# Altium PCB SecuCarBoard.PcbDoc
Units mm, origin at the board's own origin, x right, y up, seen from the top; angles counter-clockwise.
Board outline 60 x 60 mm, 4 copper layers (Top Layer, Internal Plane 1, Internal Plane 2, Bottom Layer), stack 0.462 mm thick; 183 components, 115 nets, 574 pads, 16 vias.
Unrouted connection lines stored in the file: 345.
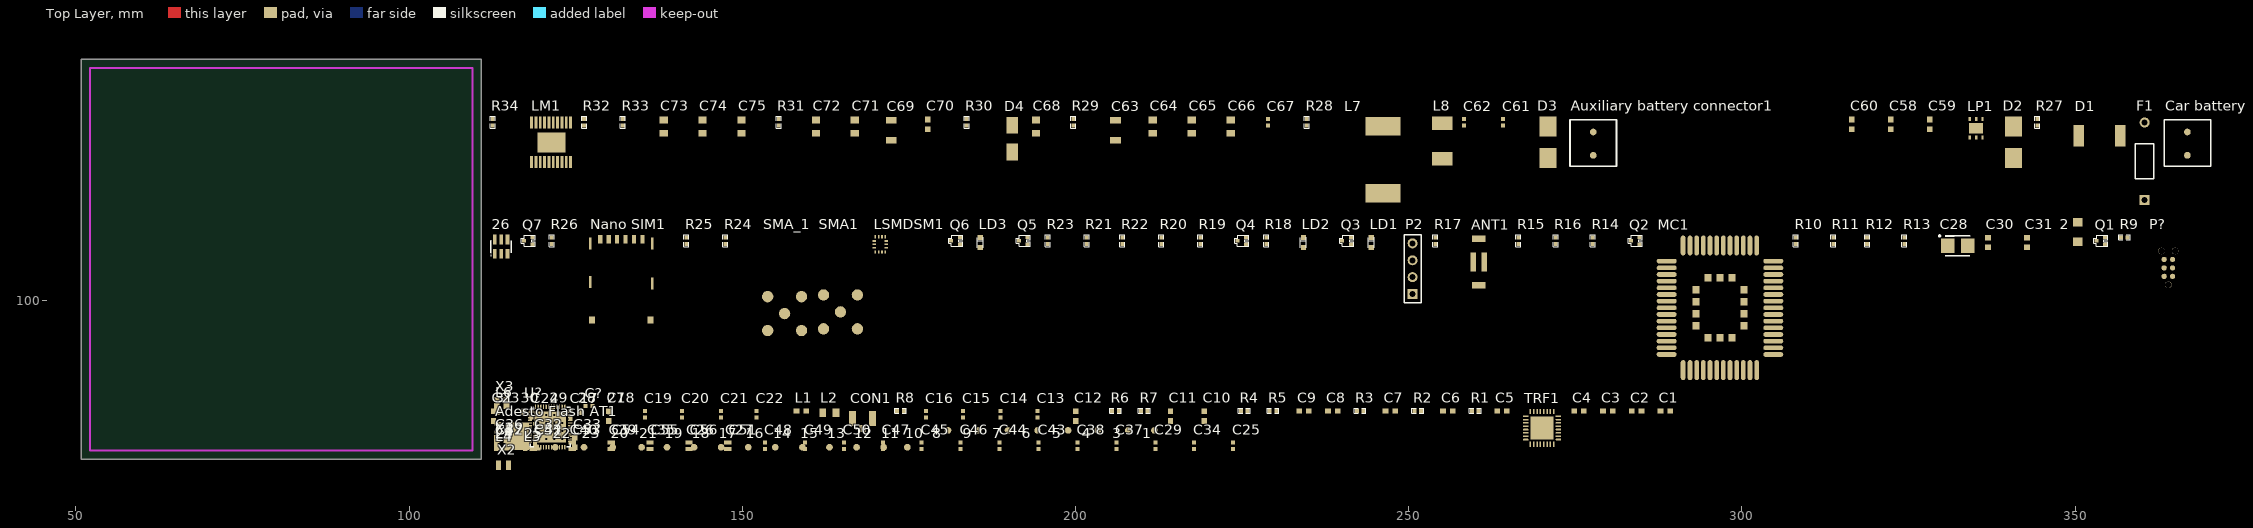
[diagram p0: Top Layer view]
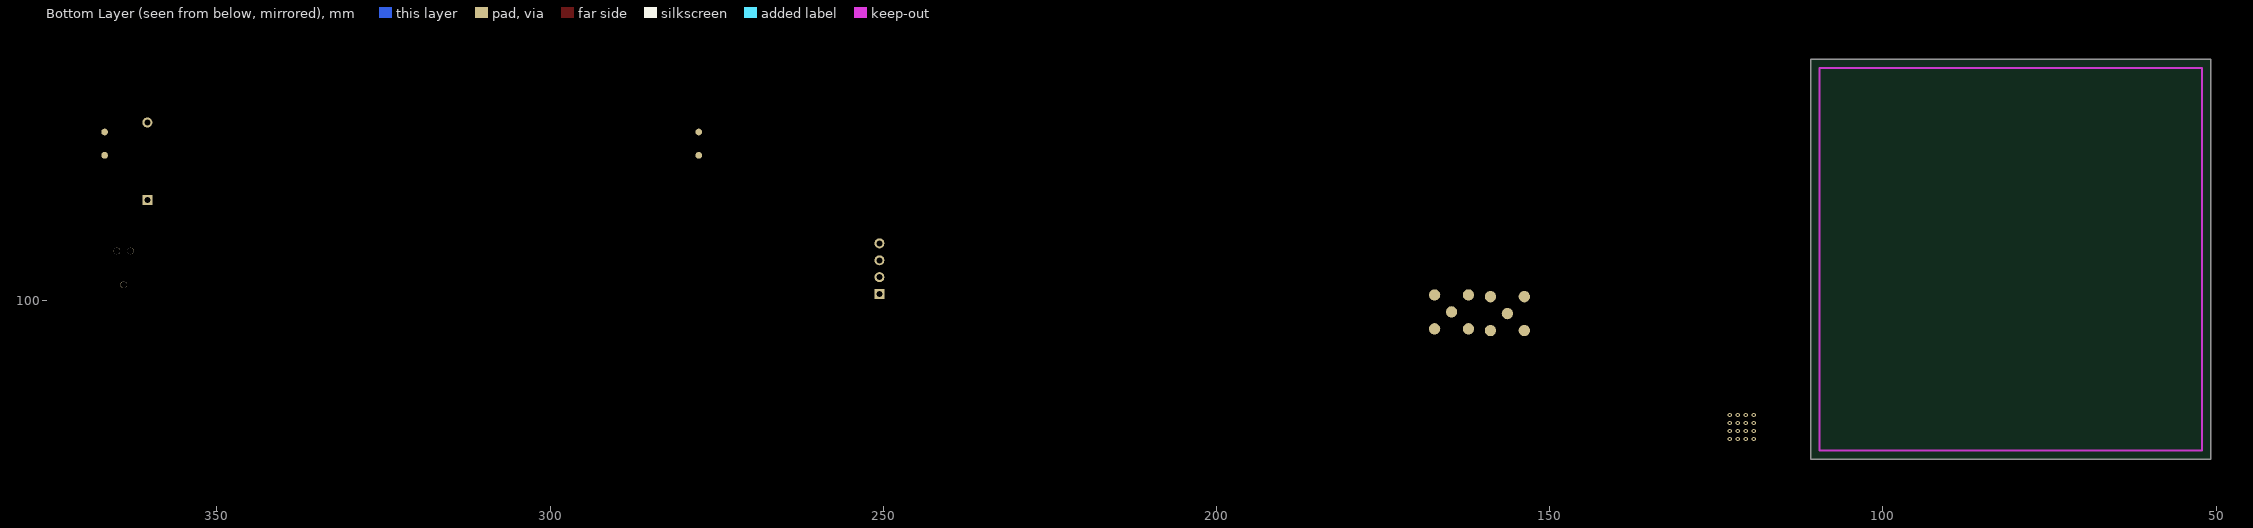
[diagram p1: Bottom Layer view, seen from below]
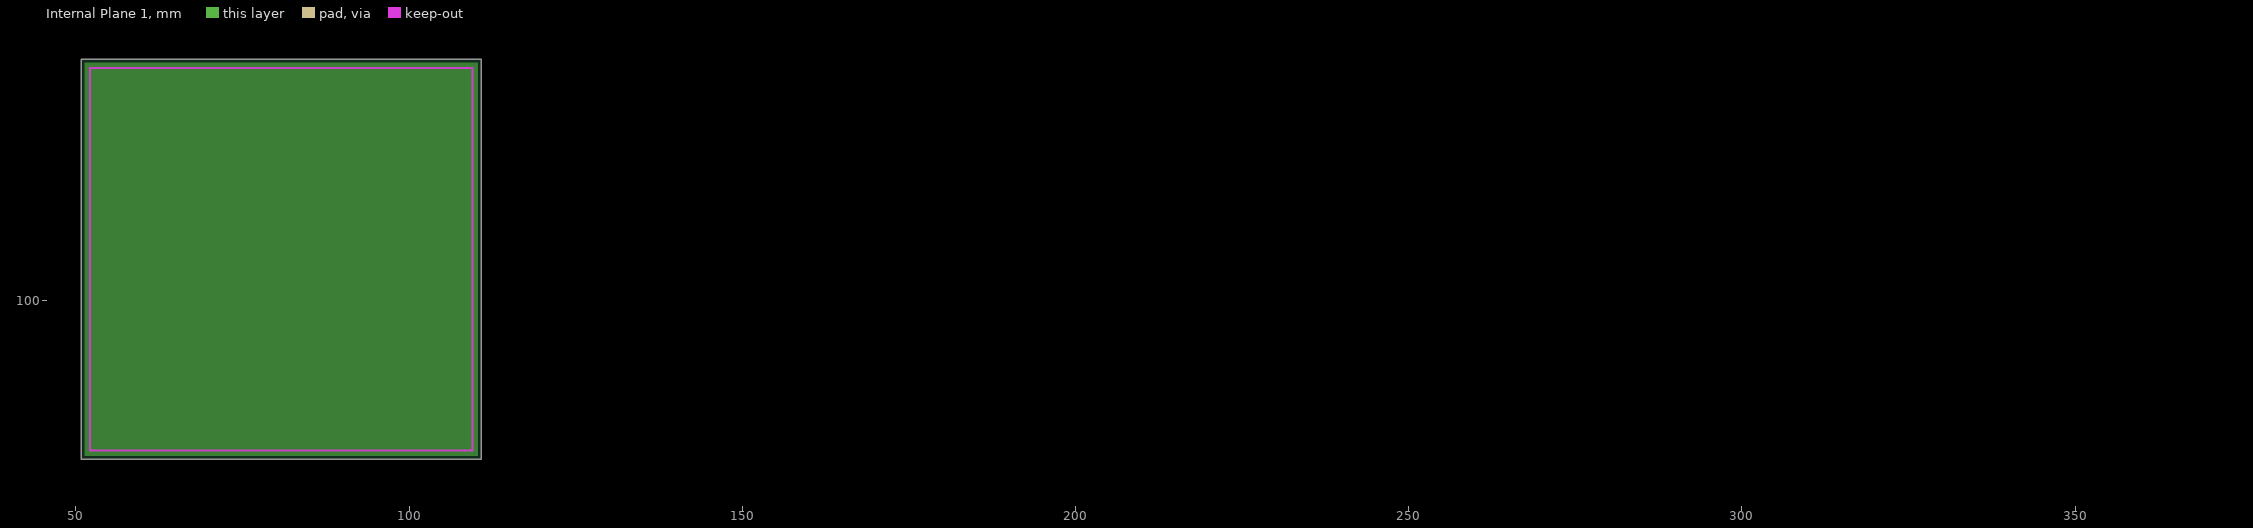
[diagram p2: Internal Plane 1, clearances drawn from the general rule]
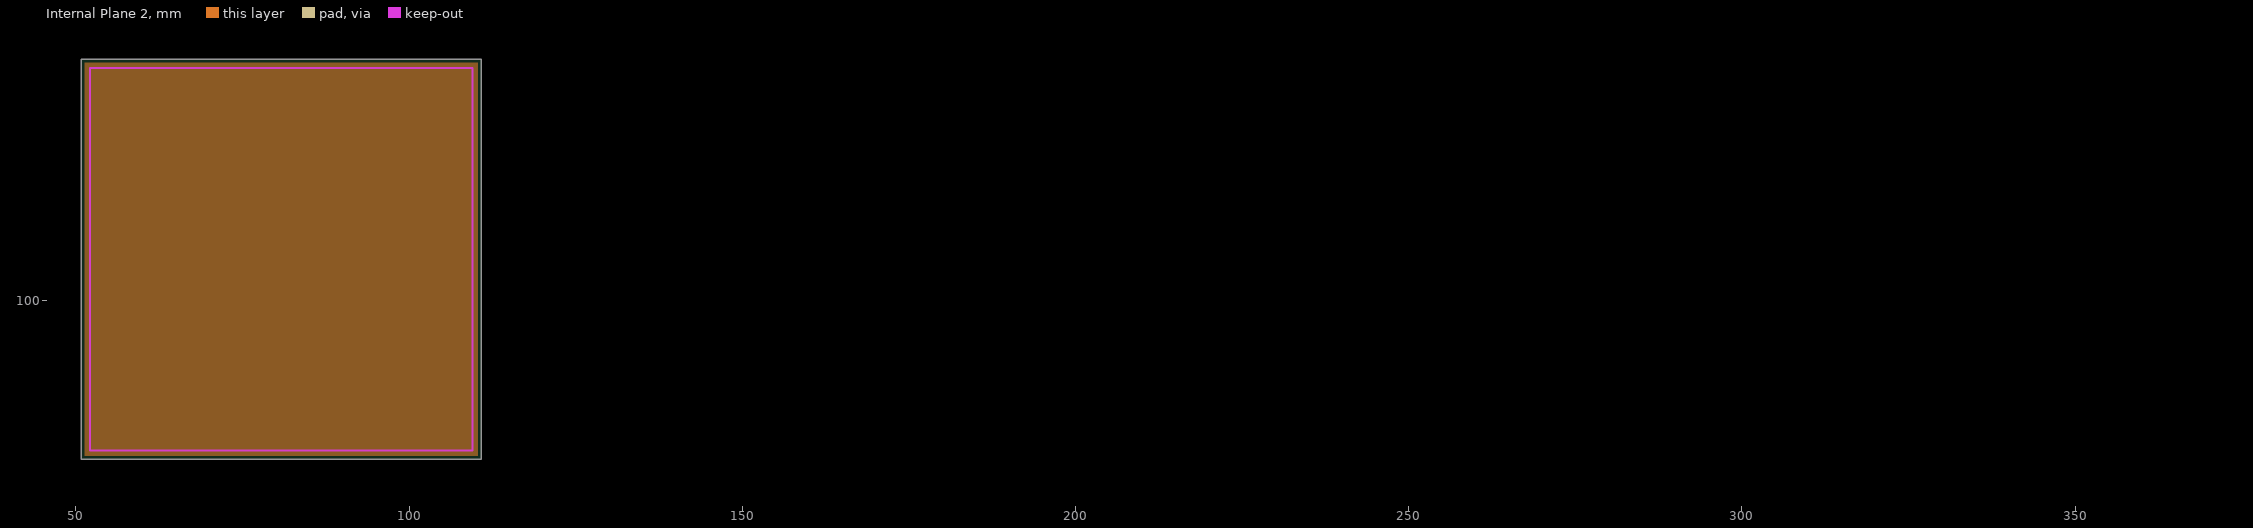
[diagram p3: Internal Plane 2, clearances drawn from the general rule]

## Layer stack, top to bottom
Top Solder: solder mask 0.0102, Solder Resist, Dk 3.5
Top Layer: signal copper 0.0356
Internal Plane 1: plane copper 0.0356
Internal Plane 2: plane copper 0.0356
Dielectric 1: dielectric 0.32, FR-4, Dk 4.8
Bottom Layer: signal copper 0.0356
Bottom Solder: solder mask 0.0102, Solder Resist, Dk 3.5

## Board outline
50.8,76.2 110.8,76.2 110.8,136.2 50.8,136.2

## Design rules (kind name [scope] priority, off if disabled: settings)
Clearance [All] p1: gap=0.2
PlaneClearance [All] p1: clearance=0.508
PlaneConnect [All] p1: planeconnectstyle=Relief reliefexpansion=0.508 reliefentries=4 reliefconductorwidth=0.254 reliefairgap=0.254
PolygonConnect [All] p1: connectstyle=Relief reliefconductorwidth=0.254 reliefentries=4 polygonreliefangle="90 Angle" airgapwidth=0.254
RoomDefinition MainBoardPower [InComponentClass('MainBoardPower')] p1: confinementstyle=ConfineIn formatcopy=TRUE lockcomponents=FALSE outline 111.887,113.919 395.732,113.919 395.732,130.429 111.887,130.429
RoomDefinition MainBoard [InComponentClass('MainBoard')] p2: confinementstyle=ConfineIn formatcopy=TRUE lockcomponents=FALSE outline 112.014,87.757 367.284,87.757 367.284,112.649 112.014,112.649
RoomDefinition Main_Board_NFC [InComponentClass('Main_Board_NFC')] p3: confinementstyle=ConfineIn formatcopy=TRUE lockcomponents=FALSE outline 112.014,77.724 289.941,77.724 289.941,86.614 112.014,86.614
RoutingVias [All] p1: holewidth=0.6 width=1 viastyle="Through Hole" minholewidth=0.711 minwidth=1.27 maxholewidth=0.711 maxwidth=1.27
SolderMaskExpansion [All] p1: expansion=0.102
Width [All] p1: maxlimit=0.2 minlimit=0.2 preferedwidth=0.2
28 further rules are at their usual default settings.

## Classes and differential pairs
component class MainBoard: 1 2 3 4 5 6 7 8 9 10 11 12 13 14 15 16 17 18 19 20 21 22 23 24 25 26 "Adesto Flash AT1" ANT1 C25 C26 C27 C28 C29 C30 C31 C32 C33 C34 C35 C36 C37 C38 C39 C40 C41 C42 C43 C44 C45 C46 C47 C48 C49 C50 C51 C52 C53 C54 C55 C56 C57 C? L3 L4 L5 L6 LD1 LD2 LD3 LSMDSM1 MC1 "Nano SIM1" P2 P? Q1 Q2 Q3 Q4 Q5 Q6 Q7 R9 R10 R11 R12 R13 R14 R15 R16 R17 R18 R19 R20 R21 R22 R23 R24 R25 R26 SMA1 SMA_1 U1 U? X2 X3
component class MainBoardPower: 27 28 29 30 31 "Auxiliary battery connector1" C58 C59 C60 C61 C62 C63 C64 C65 C66 C67 C68 C69 C70 C71 C72 C73 C74 C75 "Car battery connector1" D1 D2 D3 D4 F1 L7 L8 LM1 LP1 R27 R28 R29 R30 R31 R32 R33 R34
component class Main_Board_NFC: C1 C2 C3 C4 C5 C6 C7 C8 C9 C10 C11 C12 C13 C14 C15 C16 C17 C18 C19 C20 C21 C22 C23 C24 CON1 L1 L2 R1 R2 R3 R4 R5 R6 R7 R8 TRF1 X1

## Components (designator, comment, footprint, x,y, rotation, side; value= is the part's Value field where it differs from the comment)
1 "Ø1.0mm,SMD" TEST_POINT_1mm 211.836,80.518 r90 top
2 "DO219-AB (SMF)" DO219-AB 350.393,108.839 r90 top
3 "Ø1.0mm,SMD" TEST_POINT_1mm 207.899,80.518 r90 top
4 "Ø1.0mm,SMD" TEST_POINT_1mm 203.327,80.518 r90 top
5 "Ø1.0mm,SMD" TEST_POINT_1mm 198.882,80.518 r90 top
6 "Ø1.0mm,SMD" TEST_POINT_1mm 194.31,80.518 r90 top
7 "Ø1.0mm,SMD" TEST_POINT_1mm 189.865,80.518 r90 top
8 "Ø1.0mm,SMD" TEST_POINT_1mm 180.848,80.518 r90 top
9 "Ø1.0mm,SMD" TEST_POINT_1mm 185.42,80.518 r90 top
10 "Ø1.0mm,SMD" TEST_POINT_1mm 174.752,77.978 r0 top
11 "Ø1.0mm,SMD" TEST_POINT_1mm 171.196,77.978 r0 top
12 "Ø1.0mm,SMD" TEST_POINT_1mm 167.132,77.978 r0 top
13 "Ø1.0mm,SMD" TEST_POINT_1mm 163.068,77.978 r0 top
14 "Ø1.0mm,SMD" TEST_POINT_1mm 154.94,77.978 r0 top
15 "Ø1.0mm,SMD" TEST_POINT_1mm 159.004,77.978 r0 top
16 "Ø1.0mm,SMD" TEST_POINT_1mm 150.876,77.978 r0 top
17 "Ø1.0mm,SMD" TEST_POINT_1mm 146.812,77.978 r0 top
18 "Ø1.0mm,SMD" TEST_POINT_1mm 142.748,77.978 r0 top
19 "Ø1.0mm,SMD" TEST_POINT_1mm 138.684,77.978 r0 top
20 "Ø1.0mm,SMD" TEST_POINT_1mm 130.556,77.978 r0 top
21 "Ø1.0mm,SMD" TEST_POINT_1mm 134.874,77.978 r0 top
22 "Ø1.0mm,SMD" TEST_POINT_1mm 121.92,77.978 r0 top
23 "Ø1.0mm,SMD" TEST_POINT_1mm 126.238,77.978 r0 top
24 "Ø1.0mm,SMD" TEST_POINT_1mm 113.284,77.978 r0 top
25 "Ø1.0mm,SMD" TEST_POINT_1mm 117.602,77.978 r0 top
26 "TVS - ESD protection" SO-G6/P.95 113.792,108.077 r0 top
27 "Ø1.0mm,SMD" TEST_POINT_1mm 130.048,83.312 r0 top
28 "Ø1.0mm,SMD" TEST_POINT_1mm 125.73,83.312 r0 top
29 "Ø1.0mm,SMD" TEST_POINT_1mm 121.412,83.312 r0 top
30 "Ø1.0mm,SMD" TEST_POINT_1mm 117.094,83.312 r0 top
31 "Ø1.0mm,SMD" TEST_POINT_1mm 113.284,83.312 r0 top
"Adesto Flash AT1" "AT45DB641E" "UDFN 5x6mm 8pin" 119.126,77.089 r90 top
ANT1 "2450AT43B100" 2450AT43B100 260.477,105.791 r90 top
"Auxiliary battery connector1" "" ARK_3.5mm 281.178,120.142 r90 top
C1 "4.7µF" 0603 287.782,83.439 r0 top
C2 "2.2uF" 0603 283.464,83.439 r0 top
C3 "100nF" 0603 279.146,83.439 r0 top
C4 "10nF" 0603 274.828,83.439 r0 top
C5 "2.2uF" 0603 263.271,83.439 r0 top
C6 "10nF" 0603 255.143,83.439 r0 top
C7 "2.2uF" 0603 246.507,83.439 r0 top
C8 "10nF" 0603 237.871,83.439 r0 top
C9 "2.2uF" 0603 233.553,83.439 r0 top
C10 "10nF" 0603 219.329,81.915 r90 top
C11 "2.2uF" 0603 214.249,81.915 r90 top
C12 "10nF" 0603 200.025,81.915 r90 top
C13 "27pF" 0402 194.31,82.423 r90 top
C14 "27pF" 0402 188.722,82.423 r90 top
C15 "10pF" 0402 183.134,82.423 r90 top
C16 "1500pF" 0402 177.546,82.423 r90 top
C17 "1500pF" 0402 124.206,82.423 r90 top
C18 "1uF" 0603 129.921,81.915 r90 top
C19 "680pF" 0402 135.382,82.423 r90 top
C20 "220pF" 0402 140.97,82.423 r90 top
C21 "100pF" 0402 146.812,82.423 r90 top
C22 "27pF" 0402 152.146,82.423 r90 top
C23 "1uF" 0603 112.649,81.915 r90 top
C24 "680pF" 0402 118.364,82.423 r90 top
C25 "1.0µF" 0402 223.647,77.724 r90 top
C26 "12pF" 0402 141.732,77.724 r90 top
C27 "12pF" 0402 147.574,77.724 r90 top
C28 "" B 332.359,108.204 r0 top
C29 "100n" 0402 211.963,77.724 r90 top
C30 "" 1608[0603] 336.931,108.712 r90 top
C31 "" 1608[0603] 342.773,108.712 r90 top
C32 "10u" 0603 118.999,77.978 r90 top
C33 "10u" 0603 124.841,77.978 r90 top
C34 "100n" 0402 217.805,77.724 r90 top
C35 "12pF" 0402 135.89,77.724 r90 top
C36 "4.7µF" 0603 113.157,77.978 r90 top
C37 "100nF" 0402 206.121,77.724 r90 top
C38 "100nF" 0402 200.279,77.724 r90 top
C39 "12pF" 0402 130.048,77.724 r90 top
C40 "100pF" 0402 124.206,77.724 r90 top
C41 "100pF" 0402 118.872,77.724 r90 top
C42 "1.0pF" 0402 113.03,77.724 r90 top
C43 "100nF" 0402 194.437,77.724 r90 top
C44 "?" 0402 188.595,77.724 r90 top
C45 "?" 0402 176.911,77.724 r90 top
C46 "?" 0402 182.753,77.724 r90 top
C47 "?" 0402 171.069,77.724 r90 top
C48 "10uF" 0402 153.416,77.724 r90 top
C49 "100nF" 0402 159.385,77.724 r90 top
C50 "100nF" 0402 165.227,77.724 r90 top
C51 "100nF" 0402 148.082,77.724 r90 top
C52 "33pF" 0402 118.872,77.724 r90 top
C53 "33pF" 0402 124.714,77.724 r90 top
C54 "33pF" 0402 130.556,77.724 r90 top
C55 "33pF" 0402 136.398,77.724 r90 top
C56 "100nF" 0402 142.24,77.724 r90 top
C57 "100nF" 0402 113.03,77.724 r90 top
C58 "10u" 0603 322.326,125.73 r90 top
C59 "1u" 0603 328.168,125.73 r90 top
C60 "1u" 0603 316.484,125.73 r90 top
C61 "Capacitor_MLCC" 0402 264.16,126.238 r90 top
C62 "Capacitor_MLCC" 0402 258.318,126.238 r90 top
C63 "100uF" 1206 205.994,124.079 r90 top
C64 "22uF" 0805 211.582,125.095 r90 top
C65 "22uF" 0805 217.424,125.095 r90 top
C66 "22uF" 0805 223.266,125.095 r90 top
C67 "Capacitor_MLCC" 0402 228.854,126.238 r90 top
C68 "100nF" 0805 194.056,125.095 r90 top
C69 "100uF" 1206 172.339,124.079 r90 top
C70 "4.7uF" 0603 177.8,125.73 r90 top
C71 "10uF" 0805 166.878,125.095 r90 top
C72 "20uF" 0805 161.036,125.095 r90 top
C73 "2.2nF" 0805 138.176,125.095 r90 top
C74 "10nF" 0805 144.018,125.095 r90 top
C75 "10uF" 0805 149.86,125.095 r90 top
C? "100nF" 0402 126.492,84.201 r0 top
"Car battery connector1" "" ARK_3.5mm 370.332,120.142 r90 top
CON1 "UFL Connector" "UFL SMD" 168.021,82.296 r0 top
D1 "Transil_TVS_bidirectional" DO-214-AB 350.52,124.714 r0 top
D2 "Shottky_DO-214-AA" DO-214-AA 340.741,121.412 r90 top
D3 "Shottky_DO-214-AA" DO-214-AA 270.891,121.412 r90 top
D4 "Shottky" SMA 190.5,122.301 r90 top
F1 "Fuse 1" PIN-W2/E2.8 360.426,120.904 r90 top
L1 "150nH" 0603 158.115,83.439 r0 top
L2 "330nH" 0805 162.052,83.185 r0 top
L3 "47nH" 0402 117.348,77.724 r0 top
L4 "15nH" 0402 113.03,77.724 r0 top
L5 "10µH" 0603 113.157,77.978 r0 top
L6 "3.3nH" 0603 113.157,84.201 r0 top
L7 "12uH" SRR1210A 246.126,116.078 r0 top
L8 "105nH" "7.15mm x 7mm x 5mm" 255.016,121.285 r90 top
LD1 "LED_0603_Blue" LED_0603 244.348,108.712 r90 top
LD2 "LED_0603_Blue" LED_0603 234.188,108.712 r90 top
LD3 "LED_0603_Blue" LED_0603 185.674,108.712 r90 top
LM1 "Automotive DCDC" TSSOP20_footprint 118.364,120.777 r0 top
LP1 "LDO" WSON-6 335.153,124.46 r0 top
LSMDSM1 "LSMDSM" LGA-14L 171.958,106.934 r90 top
MC1 "Quectel MC60" "Quactel MC60 Footprint" 287.401,88.265 r0 top
"Nano SIM1" "Nano SIM" NANO_Sim_Holder 131.826,109.22 r0 top
P2 "Header 4" HDR1X4 250.571,100.965 r90 top
P? "TC2030-CTX-NL" TC2030-IDC-NLFP 363.982,104.902 r90 top
Q1 "RZE002P02TLTR-ND" SOT-416 353.822,108.966 r0 top
Q2 "RZE002P02TLTR-ND" SOT-416 283.972,108.966 r0 top
Q3 "RZE002P02TLTR-ND" SOT-416 240.665,108.966 r0 top
Q4 "RZE002P02TLTR-ND" SOT-416 224.917,108.966 r0 top
Q5 "RZE002P02TLTR-ND" SOT-416 192.151,108.966 r0 top
Q6 "RZE002P02TLTR-ND" SOT-416 181.991,108.966 r0 top
Q7 "RZE002P02TLTR-ND" SOT-416 117.856,108.966 r0 top
R1 "RES_0402_1k" RES_0402 259.969,83.439 r0 top
R2 "RES_0402_1k" RES_0402 251.333,83.439 r0 top
R3 "RES_0402_1k" RES_0402 242.697,83.439 r0 top
R4 "RES_0402_1k" RES_0402 225.298,83.439 r0 top
R5 "RES_0402_1k" RES_0402 229.616,83.439 r0 top
R6 "RES_0402_1k" RES_0402 205.994,83.439 r0 top
R7 "RES_0402_1k" RES_0402 210.312,83.439 r0 top
R8 "RES_0402_1k" RES_0402 173.736,83.439 r0 top
R9 "RES_0402_1k" RES_0402 357.378,109.474 r0 top
R10 "RES_0402_1k" RES_0402 308.102,108.966 r90 top
R11 "RES_0402_1k" RES_0402 313.69,108.966 r90 top
R12 "RES_0402_1k" RES_0402 318.77,108.966 r90 top
R13 "RES_0402_1k" RES_0402 324.358,108.966 r90 top
R14 "RES_0402_1k" RES_0402 277.622,108.966 r90 top
R15 "RES_0402_1k" RES_0402 266.446,108.966 r90 top
R16 "RES_0402_1k" RES_0402 272.034,108.966 r90 top
R17 "RES_0402_1k" RES_0402 254,108.966 r90 top
R18 "RES_0402_1k" RES_0402 228.6,108.966 r90 top
R19 "RES_0402_1k" RES_0402 218.694,108.966 r90 top
R20 "RES_0402_1k" RES_0402 212.852,108.966 r90 top
R21 "RES_0402_1k" RES_0402 201.676,108.966 r90 top
R22 "RES_0402_1k" RES_0402 207.01,108.966 r90 top
R23 "RES_0402_1k" RES_0402 195.834,108.966 r90 top
R24 "RES_0402_1k" RES_0402 147.447,108.966 r90 top
R25 "RES_0402_1k" RES_0402 141.605,108.966 r90 top
R26 "RES_0402_1k" RES_0402 121.412,108.966 r90 top
R27 "RES_0402_1k" RES_0402 344.297,126.746 r90 top
R28 "RES_0402_1k" RES_0402 234.696,126.746 r90 top
R29 "RES_0402_1k" RES_0402 199.644,126.746 r90 top
R30 "RES_0402_1k" RES_0402 183.642,126.746 r90 top
R31 "RES_0402_1k" RES_0402 155.448,126.746 r90 top
R32 "RES_0402_1k" RES_0402 126.238,126.746 r90 top
R33 "RES_0402_1k" RES_0402 132.08,126.746 r90 top
R34 "RES_0402_1k" RES_0402 112.522,126.746 r90 top
SMA1 "GNSS_SMA" SMA_Footprint 164.719,98.298 r90 top
SMA_1 "GSM_SMA" SMA_Footprint 156.337,98.044 r90 top
TRF1 "TRF7960A" RHB32 270.002,80.899 r0 top
U? "nRF52832-QFAA" QFN40P600X600X90-48N 121.158,81.026 r0 top
X1 "13.56MHz" XTAL_2016 113.157,77.851 r0 top
X2 "32.768kHz" XTAL_2012 113.411,75.311 r0 top
X3 "32MHz" XTAL_2016 113.157,84.074 r0 top

## Footprints (in the part's own frame and the unit in brackets; to place one, negate y for a bottom-side part, rotate by r counter-clockwise, add the part's x,y. Pads: shape width x height; smd on the part's side, far side on the other; paste and mask are expansions set on the pad)
"7.15mm x 7mm x 5mm" [mm]
  rect 2x3.05 smd: 1(0,0) 2(5.3,0)
0402 [mm]
  rect 0.6x0.6 smd: 1(0,0) 2(1,0)
  body extent -0.01,-0.3 1.03,0.3, height 0.34
0603 [mm]
  rect 0.85x0.8 smd: 1(0,0) 2(1.45,0)
  body extent -0.04,-0.4 1.56,0.4, height 0.6
0805 [mm]
  rect 1x1.25 smd: 1(0,0) 2(2,0)
  body extent -0.11,-0.62 1.89,0.63, height 0.78
1206 [mm]
  rect 1x1.6 smd: 1(0,0) 2(3,0)
  body extent -0.08,-0.8 3.12,0.8, height 1
1608[0603] [mm] "Chip Capacitor, Body 1.6x0.8mm, IPC High Density"
  rect 0.8x0.9 smd: 1(-0.7,0) 2(0.7,0)
  body extent -0.87,-0.48 0.87,0.48, height 1.3
2450AT43B100 [mm]
  rect 1x2 smd: 1(-3.5,0) 2(3.5,0)
  rect 2.8x0.8 smd: 3(0,-0.825) 4(0,0.825)
  body extent -3.5,-1 3.5,1, height 2
ARK_3.5mm [mm]
  round 1 all layers, no hole: 1(1.651,3.5) 2(5.151,3.5)
  silkscreen extent 0,0 6.98,6.98, body extent -0.07,0.13 6.93,7.03, height 8.8
B [mm] "Capacitor, SM Tantalum; Body 3.5 x 2.8 mm (LxW typ)"
  rect 2x2.2 smd: 1(-1.5,0) 2(1.5,0)
  silkscreen extent -2.82,-1.5 1.85,1.62, body extent -1.85,-1.46 1.85,1.47, height 2.03
DO219-AB [mm]
  rect 1.3x1.4 smd: 1(2.9,0) 2(0,0)
  body extent -0.43,-0.95 3.47,0.95, height 1.25
DO-214-AA [mm]
  rect 3x2.5 smd: 1(0,0) 2(4.7,0)
  body extent -0.24,-1.85 5.06,1.85, height 2.2
DO-214-AB [mm]
  rect 1.55x3.2 smd: 1(0,0) 2(6.25,0)
  body extent -0.85,-2.95 6.95,2.95, height 2.4
HDR1X4 [mm] "Connector; Header; 4 Position"
  rect 1.5x1.5 hole 0.9: 1(0,0)
  round 1.5 hole 0.9: 2(2.54,0) 3(5.08,0) 4(7.62,0)
  silkscreen extent -1.27,-1.27 8.89,1.27
LED_0603 [mm]
  rect 0.8x0.8 smd: 1(-0.75,0) 2(0.75,0)
  silkscreen extent -0.77,-0.45 0.77,0.45, body extent -0.8,-0.4 0.8,0.4, height 0.28
LGA-14L [mm]
  round 0.1 on Top Overlay: 1(0.127,2.286)
  rect 0.5x0.25 smd: 1(0.35,2) 2(0.35,1.5) 3(0.35,1) 4(0.35,0.5) 8(2.65,0.5) 9(2.65,1) 10(2.65,1.5) 11(2.65,2)
  rect 0.25x0.5 smd: 5(1,0.35) 6(1.5,0.35) 7(2,0.35) 12(2,2.15) 13(1.5,2.15) 14(1,2.15)
  body extent 0.02,0.02 3.02,2.52, height 1
NANO_Sim_Holder [mm]
  rect 0.65x1.3 smd: C1(1.905,0) C2(-0.635,0) C3(-1.905,0) C5(3.175,0) C6(0.635,0) C7(-3.175,0)
  rect 0.35x1.8 smd: ""(-4.65,-6.42) ""(-4.65,-0.67) ""(4.65,-6.65) ""(4.65,-0.67)
  rect 0.9x1 smd: ""(-4.4,-12.14) ""(4.4,-12.14)
  body extent -4.75,-12.6 4.75,-0.1, height 1.1
PIN-W2/E2.8 [mm] "Thru-Hole; 2 Leads"
  rect 1.5x1.5 hole 0.9: 1(-5.825,0)
  round 1.5 hole 0.9: 2(5.825,0)
  silkscreen extent -2.65,-1.4 2.65,1.4
QFN40P600X600X90-48N [mm]
  oval 0.65x0.2 smd: 1(-3.025,2.2) 2(-3.025,1.8) 3(-3.025,1.4) 4(-3.025,1) 5(-3.025,0.6) 6(-3.025,0.2) 7(-3.025,-0.2) 8(-3.025,-0.6) 9(-3.025,-1) 10(-3.025,-1.4) 11(-3.025,-1.8) 12(-3.025,-2.2) 25(3.025,-2.2) 26(3.025,-1.8) 27(3.025,-1.4) 28(3.025,-1) 29(3.025,-0.6) 30(3.025,-0.2) 31(3.025,0.2) 32(3.025,0.6) 33(3.025,1) 34(3.025,1.4) 35(3.025,1.8) 36(3.025,2.2)
  oval 0.2x0.65 smd: 13(-2.2,-3.025) 14(-1.8,-3.025) 15(-1.4,-3.025) 16(-1,-3.025) 17(-0.6,-3.025) 18(-0.2,-3.025) 19(0.2,-3.025) 20(0.6,-3.025) 21(1,-3.025) 22(1.4,-3.025) 23(1.8,-3.025) 24(2.2,-3.025) 37(2.2,3.025) 38(1.8,3.025) 39(1.4,3.025) 40(1,3.025) 41(0.6,3.025) 42(0.2,3.025) 43(-0.2,3.025) 44(-0.6,3.025) 45(-1,3.025) 46(-1.4,3.025) 47(-1.8,3.025) 48(-2.2,3.025)
  rect 4.7x4.7 smd: 49(0,0)
  silkscreen extent -4.02,-3 3,3, body extent -3.02,-3.02 3.02,3.02, height 0.86
"Quactel MC60 Footprint" [mm]
  round 0.5 on Top Overlay: 0(1.8,19.35)
  rrect100% 3x0.7 smd: 1(1.3,17.65) 2(1.3,16.65) 3(1.3,15.65) 4(1.3,14.65) 5(1.3,13.65) 6(1.3,12.65) 7(1.3,11.65) 8(1.3,10.65) 9(1.292,9.65) 10(1.292,8.65) 11(1.292,7.65) 12(1.292,6.65) 13(1.292,5.65) 14(1.292,4.65) 15(1.292,3.65) 28(17.292,3.65) 29(17.292,4.65) 30(17.292,5.65) 31(17.292,6.65) 32(17.292,7.65) 33(17.292,8.65) 34(17.292,9.65) 35(17.3,10.65) 36(17.3,11.65) 37(17.3,12.65) 38(17.3,13.65) 39(17.3,14.65) 40(17.3,15.65) 41(17.3,16.65) 42(17.3,17.65)
  rrect100% 0.7x3 smd: 16(3.759,1.3) 17(4.8,1.3) 18(5.8,1.3) 19(6.8,1.3) 20(7.8,1.3) 21(8.8,1.3) 22(9.8,1.3) 23(10.8,1.3) 24(11.8,1.3) 25(12.8,1.3) 26(13.8,1.3) 27(14.8,1.3) 43(14.8,20) 44(13.8,20) 45(12.8,20) 46(11.8,20) 47(10.8,20) 48(9.8,20) 49(8.8,20) 50(7.8,20) 51(6.8,20) 52(5.8,20) 53(4.8,20) 54(3.759,20)
  rect 1.1x1.1 smd: 55(5.7,13.35) 56(5.7,11.55) 57(5.7,9.75) 58(5.7,7.95) 59(7.5,6.15) 60(9.3,6.15) 61(11.1,6.15) 62(12.9,7.95) 63(12.9,9.75) 64(12.9,11.55) 65(12.9,13.35) 66(11.1,15.15) 67(9.3,15.15) 68(7.5,15.15)
RES_0402 [mm]
  rect 0.6x0.55 smd: 1(-0.5,0) 2(0.5,0)
  silkscreen extent -0.87,-0.38 0.88,0.38, body extent -0.5,-0.25 0.5,0.25, height 0.3
RHB32 [mm]
  rrect50% 0.23x0.8 smd: 1(-1.75,-2.45) 2(-1.25,-2.45) 3(-0.75,-2.45) 4(-0.25,-2.45) 5(0.25,-2.45) 6(0.75,-2.45) 7(1.25,-2.45) 8(1.75,-2.45) 17(1.75,2.45) 18(1.25,2.45) 19(0.75,2.45) 20(0.25,2.45) 21(-0.25,2.45) 22(-0.75,2.45) 23(-1.25,2.45) 24(-1.75,2.45)
  rrect50% 0.8x0.23 smd: 9(2.45,-1.75) 10(2.45,-1.25) 11(2.45,-0.75) 12(2.45,-0.25) 13(2.45,0.25) 14(2.45,0.75) 15(2.45,1.25) 16(2.45,1.75) 25(-2.45,1.75) 26(-2.45,1.25) 27(-2.45,0.75) 28(-2.45,0.25) 29(-2.45,-0.25) 30(-2.45,-0.75) 31(-2.45,-1.25) 32(-2.45,-1.75)
  rect 3.45x3.45 smd: GND(0,0)
  body extent -2.56,-2.56 2.56,2.56, height 1.01
SMA [mm]
  rect 2.5x1.7 smd: 1(0,0) 2(4,0)
  body extent -0.89,-1.47 4.71,1.48, height 2.7
SMA_Footprint [mm]
  round 1.7 all layers, no hole: 1(0,0) GND(-2.54,-2.54) GND(-2.54,2.54) GND(2.54,-2.54) GND(2.54,2.54)
  body extent -3.18,-3.18 11.63,3.18, height 9.55
SO-G6/P.95 [mm] "SOT-457/SC-74; 6 Leads; Body 3.1 x 3 mm, inc. leads (LxW max)"
  rect 0.55x1.45 smd: 1(-0.95,-1.075) 2(0,-1.075) 3(0.95,-1.075) 4(0.95,1.075) 5(0,1.075) 6(-0.95,1.075)
  silkscreen extent -1.57,-1.35 1.55,0.9, body extent -1.46,-1.16 1.44,1.24, height 1
SOT-416 [mm]
  rect 0.6x0.5 smd: 1(0.65,-0.5) 2(0.65,0.5) 3(-0.65,0)
  silkscreen extent -1.05,-0.85 1.05,0.85, body extent -0.8,-0.8 0.8,0.8, height 0.78
SRR1210A [mm]
  rect 5.3x2.8 smd: 1(0,0) 2(0,10.1)
  body extent -6.03,-0.92 5.97,11.08, height 9.42
TC2030-IDC-NLFP [mil]
  round 39 hole 39 unplated: 0(-100,0) 0(100,-40) 0(100,40)
  round 31 smd paste-196.85: 1(-50,-25) 2(-50,25) 3(0,-25) 4(0,25) 5(50,-25) 6(50,25)
  Top Layer pour cut-out: -50,25 -50,-25 50,-25 50,25
TEST_POINT_1mm [mm]
  round 1 smd: 0(0,0)
TSSOP20_footprint [mm]
  rect 0.42x1.78 smd: 1(0,0) 2(0.65,0) 3(1.3,0) 4(1.95,0) 5(2.6,0) 6(3.25,0) 7(3.9,0) 8(4.55,0) 9(5.2,0) 10(5.85,0) 11(5.85,5.94) 12(5.2,5.94) 13(4.55,5.94) 14(3.9,5.94) 15(3.25,5.94) 16(2.6,5.94) 17(1.95,5.94) 18(1.3,5.94) 19(0.65,5.94) 20(0,5.94)
  rect 4.2x3 smd: 21(2.97,2.925)
  body extent -0.33,-0.15 6.17,6.25, height 1.2
"UDFN 5x6mm 8pin" [mm]
  rect 4.1x3.5 smd: 0(2.54,2.921)
  rect 0.5x1.1 smd: 1(0.635,0) 1(0.635,0) 2(1.905,0) 2(1.905,0) 3(3.175,0) 3(3.175,0) 4(4.445,0) 4(4.445,0) 5(4.445,5.8) 6(3.175,5.8) 7(1.905,5.8) 8(0.635,5.8)
"UFL SMD" [mm]
  rect 1x1 smd: 1(0,-1.5)
  rect 1.05x2.2 smd: 2(-1.475,0) 2(1.475,0)
  body extent -1.7,-1.55 1.7,1.55, height 1.25
WSON-6 [mm]
  rect 0.351x0.61 smd: 1(-0.95,0) 2(0,0) 3(0.95,0) 4(0.95,2.8) 5(0,2.8) 6(-0.95,2.8)
  round 0.2 on Top Overlay: 2(-1.476,-0.113)
  rect 2.1x1.6 smd: ""(0,1.4)
  body extent -1.48,-0.11 1.52,2.91, height 0.75
XTAL_2012 [mm]
  rect 0.7x1.4 smd: 1(0,0) 2(1.5,0)
  body extent -0.26,-0.62 1.79,0.62, height 0.63
XTAL_2016 [mm]
  rect 0.8x0.7 smd: 1(0,0) 2(1.4,0) 3(1.4,1.1) 4(0,1.1)
  body extent -0.36,-0.29 1.64,1.31, height 0.7

## Part data
1 3 4 5 6 7 8 9 10 11 12 13 14 15 16 17 18 19 20 21 22 23 24 25 27 28 29 30 31: library part TESTPAD, "1.0mm circular SMD testpad"
2: library part "Zener Diode"
26: library part TPD4E001-DBV
"Auxiliary battery connector1" "Car battery connector1" SMA1 SMA_1: library part Component_1
C1 C2 C5 C7 C9 C11 C18 C23 C32 C33 C36 C58 C59 C60: library part C0603-4µ7, "Capacitor, X5R, ±10%"
C3 C4 C6 C8 C10 C12: library part C0201-100n, "Capacitor, X7R, ±10%"
C13 C14 C15 C16 C17 C19 C20 C21 C22 C24 C63 C64 C65 C66 C68 C69 C70 C71 C72 C73 C74 C75: library part Capacitor_MLCC, "?"
C25: library part C0402-1µ0, "Capacitor, X5R, ±5%"
C26 C27 C35 C39: library part C0201-12p, "Capacitor, NP0, ±2%"
C28: library part CAP_B_100u, "Solid Tantalum Capacitor"
C29 C34 C37 C38 C43 C44 C45 C46 C47 C48 C49 C50 C51 C52 C53 C54 C55 C56 C57 C?: library part CAP_0402, "Capacitor, NP0, ±2%"
C30 C31: library part "Cap Semi", "Capacitor (Semiconductor SIM Model)"
C40 C41: library part C0201-100p, "Capacitor, NP0, ±5%"
C42: library part C0201-1.0p, "Capacitor, NP0, ±5%"
C61 C62 C67: "?"
D1: library part TVS_bidirectional, "TVS_bi"
D4: library part Shottky_diode
F1: "Fuse"
L1 L2 L7 L8: library part Inductor
L3 L4: library part L0402-15n, "High frequency chip inductor ±10%"
L5: library part L0603-10µ, "Chip inductor, IDC,min = 50 mA, ±20%"
L6: library part L0201-3n3, "High frequency chip inductor ±5%"
LM1: library part LM26003-q1
LP1: library part "LP38693 WSON Package"
P2: "Header, 4-Pin"
P?: library part CONN-2x3_No_BOM, "CBL PLUG-OF-NAILS 6-PIN"
U?: library part nRF52832_QFAA, "Multi-protocol Bluetooth Low Energy and 2.4GHz proprietary system-on-chip"
X1 X3: library part XTAL_SMD2016_32MHz_8pF_Epson, "XTAL SMD 2016, 32MHz, Cl=8pF, Total Tol: ±40ppm"
X2: library part XTAL_SMD2012_32.768kHz_9pF_Seiko, "XTAL SMD 2012, 32.768kHz, Cl=9pF, Total Tol: ±50ppm"

## Via types
v1: diameter 0.66, hole 0.33, Top Layer to Bottom Layer, 16 vias

## Nets (pads, with @x,y where several pads share a name; then routed paths per layer and width w, separated by ;. In a path a pad name is that pad's centre, name@x,y a point inside that pad or via, vN(x,y) a via of type N, cw(c..) or ccw(c..) an arc to the next point about the centre after c; other vN are vias at no path point)
3.3V: C33.1 C34.2 C36.1 C37.2 C43.2 C60.1 C?.2 LD1.1 LD2.1 LP1.4 LP1.5 MC1.26 P?.1 Q5.3 Q7.3 R4.2 R5.2 R9.2 TRF1.16 U?.13 U?.36 U?.48
4V: 26.5 C1.2 C2.1 C3.2 C4.2 C57.2 C58.1 C59.1 C70.1 C72.2 L8.2 LP1.1 LP1.6 Q1.3 Q6.3 R27.2 TRF1.2
DEC4: C25.2 L4.1 U?.46
GND: 2.1 26.2 "Adesto Flash AT1.7" "Auxiliary battery connector1.1" "Car battery connector1.1" C1.1 C2.2 C3.1 C4.1 C5.2 C6.1 C7.2 C8.1 C9.2 C10.1 C11.2 C12.1 C13.1 C14.1 C19.1 C21.1 C22.2 C23.2 C24.1 C25.1 C26.2 C27.2 C28.2 C29.1 C30.1 C31.1 C32.2 C33.2 C34.1 C35.1 C36.2 C37.1 C38.2 C39.1 C40.2 C41.1 C42.1 C43.1 C44.2 C45.2 C46.2 C47.2 C48.2 C49.1 C50.1 C52.2 C53.2 C54.1 C55.2 C56.1 C57.1 C58.2 C59.2 C60.2 C61.2 C62.2 C63.1 C64.1 C65.1 C66.1 C67.1 C69.1 C70.2 C71.1 C72.1 C73.1 C75.1 C?.1 CON1.2 D1.1 D4.1 LM1.10 LM1.11 LM1.13 LM1.21 LP1.2@335.153,124.46 LSMDSM1.2 LSMDSM1.3 LSMDSM1.6 LSMDSM1.7 MC1.14 MC1.27 MC1.31 MC1.40 MC1.42 MC1.44 MC1.45 MC1.48 MC1.49 P2.4 P?.5 Q2.2 R1.1 R2.1 R14.1 R16.1 R17.1 R18.1 R23.1 R31.2 R32.2 R33.2 R34.2 TRF1.6 TRF1.7 TRF1.10 TRF1.15 TRF1.17 TRF1.29 U?.31 U?.45 U?.49 X1.2 X1.4 X3.2 X3.4
  other v1: 119.358,79.226 120.558,79.226 121.758,79.226 122.958,79.226 119.358,80.426 120.558,80.426 121.758,80.426 122.958,80.426 119.358,81.626 120.558,81.626 121.758,81.626 122.958,81.626 119.358,82.826 120.558,82.826 121.758,82.826 122.958,82.826
Net1_1: Q1.1 U?.20
Net2_2: 2.2 C28.1 C29.2 C30.2 C31.2 C32.1 MC1.50 MC1.51 Q1.2
Net4_1: MC1.34 R10.1 R14.2
Net5_1: MC1.33 R11.1
Net6_1: MC1.39 R12.1 R16.2
Net7_1: MC1.38 R13.1
Net8_1: MC1.35 R15.2
Net9_1: Q2.1 U?.24
Net10_1: Q5.1 U?.6
Net11_1: MC1.47 Q6.1
Net12_1: LSMDSM1.14 U?.7
Net13_1: LSMDSM1.13 U?.8
Net14_1: LSMDSM1.1@169.958,107.284 U?.9
Net15_1: LSMDSM1.12 U?.10
Net16_1: LSMDSM1.4 U?.11
Net17_1: LSMDSM1.9 U?.12
Net18_1: 26.1 "Nano SIM1.C1" C51.1 C55.1 MC1.18
Net19_1: "Adesto Flash AT1.4" U?.40
Net20_1: "Adesto Flash AT1.3" "Adesto Flash AT1.5" "Adesto Flash AT1.6" C56.2 Q7.2
Net22_1: Q7.1 U?.39
Net23_1: "Adesto Flash AT1.2" U?.43
Net24_1: "Adesto Flash AT1.8" TRF1.23 U?.42
Net25_1: "Adesto Flash AT1.1" TRF1.24 U?.41
Net26_3: 26.3 "Nano SIM1.C3" C52.1 R26.2
Net26_4: 26.4 "Nano SIM1.C2" C53.1 R25.2
Net26_6: 26.6 "Nano SIM1.C7" C54.2 R24.2
Net27_1: C62.1 C63.2 C64.2 C65.2 C66.2 C67.2 D2.2 D3.2 LM1.1 LM1.2 LM1.3 LM1.4 R28.1
NetANT1_1: ANT1.1 L6.2
"NetAuxiliary battery connector1_2": "Auxiliary battery connector1.2" D3.1
NetC5_1: C5.1 C6.2 TRF1.1
NetC7_1: C7.1 C8.2 TRF1.3 TRF1.4
NetC9_1: C9.1 C10.2 TRF1.32
NetC11_1: C11.1 C12.2 TRF1.11
NetC13_2: C13.2 TRF1.31 X1.3
NetC14_2: C14.2 TRF1.30 X1.1
NetC15_1: C15.1 C20.2 C21.2 C22.1 L2.2 R8.2
NetC15_2: C15.2 C18.1 C19.2 L1.2 L2.1
NetC16_1: C16.1 C17.1 TRF1.5
NetC16_2: C16.2 C17.2 L1.1
NetC18_2: C18.2 C23.1 TRF1.8
NetC20_1: C20.1 C24.2 TRF1.9
NetC35_2: C35.2 U?.35 X3.3
NetC38_1: C38.1 U?.1
NetC39_2: C39.2 U?.34 X3.1
NetC40_1: C40.1 U?.33
NetC41_2: C41.2 U?.32
NetC42_2: C42.2 L6.1 U?.30
NetC44_1: C44.1 MC1.41 R22.2
NetC45_1: C45.1 MC1.15 R21.1
NetC46_1: C46.1 R22.1 SMA_1.1
NetC47_1: C47.1 L3.2 R21.2 SMA1.1
NetC48_1: C48.1 C49.2 C50.2 LSMDSM1.5 LSMDSM1.8 Q5.2
NetC51_2: "Nano SIM1.C5" C51.2 MC1.16
NetC68_1: C68.1 LM1.17
NetC68_2: C68.2 D4.2 L7.1 LM1.18 LM1.19 LM1.20
NetC69_2: C69.2 C75.2 L7.2 L8.1 LM1.15 R29.1
NetC73_2: C73.2 LM1.7
NetC74_1: C74.1 R34.1
NetC74_2: C74.2 LM1.8
"NetCar battery connector1_2": "Car battery connector1.2" D1.2 F1.1
NetCON1_1: CON1.1 R8.1
NetD2_1: D2.1 F1.2
NetL3_1: L3.1 R9.1
NetL4_2: L4.2 L5.1
NetL5_2: L5.2 U?.47
NetLD1_2: LD1.2 Q3.3
NetLD2_2: LD2.2 Q4.3
NetLD3_1: LD3.1 Q6.2
NetLD3_2: LD3.2 R23.2
NetLM1_5: LM1.5 R30.1
NetLM1_6: LM1.6 R28.2
NetLM1_9: LM1.9 R29.2 R31.1
NetLM1_12: LM1.12 R33.1
NetLM1_14: LM1.14 R32.1
NetLP1_3: LP1.3 R27.1
NetMC1_5: MC1.5 Q2.3
NetMC1_19: MC1.19 R26.1
NetMC1_20: MC1.20 R25.1
NetMC1_21: MC1.21 R24.1
NetMC1_22: MC1.22 R20.1
NetMC1_23: MC1.23 R19.1
NetMC1_24: MC1.24 R20.2
NetMC1_25: MC1.25 R19.2
NetMC1_28: MC1.28 U?.19
NetP2_1: P2.1 Q4.1 U?.28
NetP2_2: P2.2 Q3.1 U?.27
NetP2_3: P2.3 U?.21
NetP?_2: P?.2 U?.26
NetP?_4: P?.4 U?.25
NetQ3_2: Q3.2 R17.2
NetQ4_2: Q4.2 R18.2
NetR1_2: R1.2 TRF1.25 U?.38
NetR2_2: R2.2 TRF1.28 U?.37
NetR3_1: R3.1 TRF1.13
NetR3_2: R3.2 U?.4
NetR4_1: R4.1 TRF1.19
NetR5_1: R5.1 TRF1.18
NetR6_1: R6.1 U?.22
NetR6_2: R6.2 TRF1.12
NetR7_1: R7.1 U?.23
NetR7_2: R7.2 TRF1.14
NetR10_2: R10.2 U?.14
NetR11_2: R11.2 U?.15
NetR12_2: R12.2 U?.16
NetR13_2: R13.2 U?.17
NetR15_1: R15.1 U?.18
NetTRF1_21: TRF1.21 U?.5
NetTRF1_26: TRF1.26
P0.00/XL1: C27.1 U?.2 X2.2
P0.01/XL2: C26.1 U?.3 X2.1
VDD_INT: C61.1 C71.2 LM1.16 R30.2
pads on no net: 1.0 3.0 4.0 5.0 6.0 7.0 8.0 9.0 10.0 11.0 12.0 13.0 14.0 15.0 16.0 17.0 18.0 19.0 20.0 21.0 22.0 23.0 24.0 25.0 27.0 28.0 29.0 30.0 31.0 "Adesto Flash AT1.0" "Nano SIM1." "Nano SIM1.C6" ANT1.2 ANT1.3 ANT1.4 LP1. LP1.2@333.677,124.347 LSMDSM1.1@169.672,107.061 LSMDSM1.10 LSMDSM1.11 MC1.0 MC1.1 MC1.2 MC1.3 MC1.4 MC1.6 MC1.7 MC1.8 MC1.9 MC1.10 MC1.11 MC1.12 MC1.13 MC1.17 MC1.29 MC1.30 MC1.32 MC1.36 MC1.37 MC1.43 MC1.46 MC1.52 MC1.53 MC1.54 MC1.55 MC1.56 MC1.57 MC1.58 MC1.59 MC1.60 MC1.61 MC1.62 MC1.63 MC1.64 MC1.65 MC1.66 MC1.67 MC1.68 P?.0 P?.3 P?.6 SMA1.GND SMA_1.GND TRF1.20 TRF1.22 TRF1.27 TRF1.GND U?.29 U?.44

## Keep-outs
Keep-Out Layer:
  lines w0.3: 52.1,77.5 109.5,77.5 109.5,134.9 52.1,134.9 52.1,77.5

## Silkscreen, mask and mechanical layers (free items; w line width, h text height)
Drill Drawing:
  text ".LEGEND" at 115.88,81.28 h1.52
  text "Drill Drawing." at 115.88,78.74 h1.52

## Dimensions
52.1,77.5 to 109.5,77.5 on Mechanical 1
52.1,77.5 to 52.1,134.9 on Mechanical 1